# EAGLE board BLE -- HM-10 -- Carduino Breakout v1.0.3 (EAGLE 6.5.0)
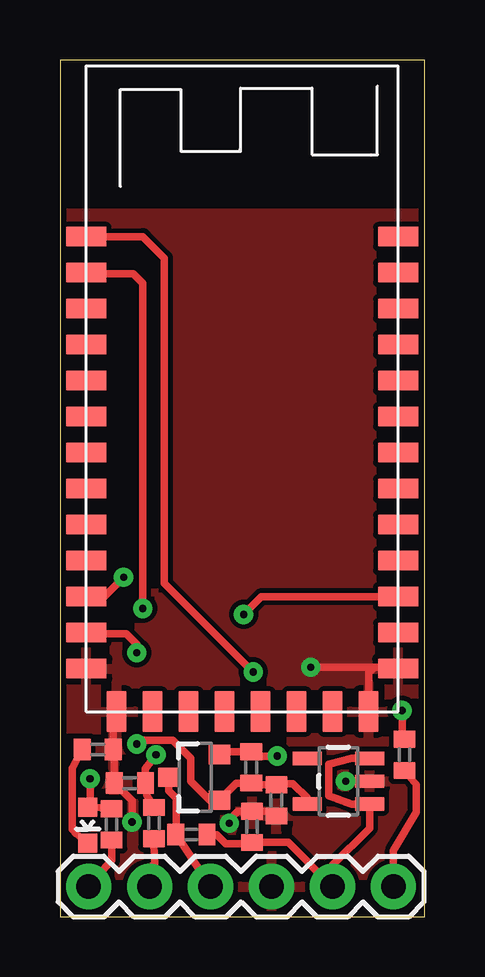
[diagram p0: board, top side]
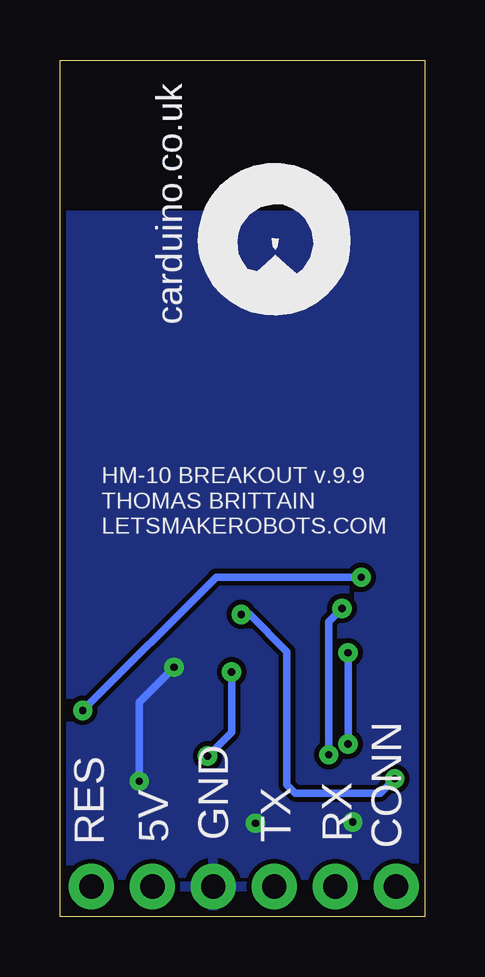
[diagram p1: board, bottom side, seen from below]

Size 15.2 x 35.7 mm. Coordinates in mm from the lower left corner, seen from the top.
Outline: 0,0 15.2,0 15.2,35.7 0,35.7 0,0
Copper layers (1*16): Top 0.035mm / dielectric 1.5mm / Bottom 0.035mm
Design rules "SparkFun (1)": minimum track width 8mil, minimum drill 20mil, track to track 8mil, track to pad 8mil, pad to pad 8mil, via to via 8mil, smd to smd 8mil, copper to edge 10mil, drill to drill 8mil, minimum pad ring 12mil, minimum via ring 10mil, stop-mask expansion 4mil, vias tented up to drill 25mil, thermal gap 10mil

## Footprints (pad centres in the part's own frame; a part is rotated, then mirrored left to right if it is on the bottom)
SOT23-3 = smd 0.8 x 0.9: 1 -0.95,-1; 2 0.95,-1; 3 0,1.1
C0402 = smd 0.7 x 0.9: 1 -0.65,0; 2 0.65,0
LED-0603 = smd 0.8 x 0.8: A 0,-0.75; C 0,0.75
1X06 = drill 1.016 pad 1.88: 1 0,0; 2 2.54,0; 3 5.08,0; 4 7.62,0; 5 10.16,0; 6 12.7,0
R0402 = smd 0.7 x 0.9: 1 -0.65,0; 2 0.65,0
SOT23-5 = smd 0.55 x 1.2: 1 -0.95,-1.3; 2 0,-1.3; 3 0.95,-1.3; 4 0.95,1.3; 5 -0.95,1.3
BLE-HM-10 = smd 1.676 x 0.813: 3.3V 0,3.29; AIO0 0,7.79; AIO1 0,6.29; GND1 0,1.79; GND4 13,1.79; PCM_CLK 0,13.79; PCM_IN 0,10.79; PCM_OUT 0,12.29; PCM_SYNC 0,9.29; PIO0 13,3.29; PIO1 13,4.79; PIO2 13,6.29; PIO3 13,7.79; PIO4 13,9.29; PIO5 13,10.79; PIO6 13,12.29; PIO7 13,13.79; PIO8 13,15.29; PIO9 13,16.79; PIO10 13,18.29; PIO11 13,19.79; RESET 0,4.79; UART_CTS 0,16.79; UART_RTS 0,15.29; UART_RX 0,18.29; UART_TX 0,19.79 | smd 0.813 x 1.676: GND2 1.27,0; GND3 11.77,0; SPI_CLK 8.77,0; SPI_CSB 4.27,0; SPI_MISO 7.27,0; SPI_MOSI 5.77,0; USB_D+ 10.27,0; USB_D- 2.77,0

## Placement (x,y rotation side)
BSS138  MOSFET-NCHANNELSMD  [SOT23-3]  5.64,5.81 90 top
C1  1uF  [C0402]  8,3.75 90 top
C2  1uF  [C0402]  9.02,4.85 270 top
CONN_LED  [LED-0603]  1.16,3.82 180 top
JP1  [1X06]  1.19,1.26 0 top
R3  10k  [R0402]  3.92,3.9 90 top
R4  20k  [R0402]  2.91,5.57 180 top
R5  10k  [R0402]  5.48,3.43 0 top
R6  10k  [R0402]  7.97,6.22 270 top
R7  470  [R0402]  1.57,6.97 180 top
R8  10K  [R0402]  2.15,3.85 90 top
R9  10K  [R0402]  14.35,6.75 270 top
U1  V_REG_LDOSMD  [SOT23-5]  11.6,5.65 90 top
U$1  BLE-HM-10  [BLE-HM-10]  1.09,8.55 0 top
U$3  [OSHW_FILLX70_NOTEXT]  61.67,22.38 0 top  (outside the outline)

## Library data of the parts
BSS138 CONN_LED U1 = SparkFun
C1 C2 R3-R9 = resistor
JP1 = SparkFun-Connectors
U$1 = Random parts
U$3 = ohw-logo

## Nets
3_3V: BSS138.1 C2.1 R6.2 U1.5 U$1.3.3V
5V: C1.1 JP1.5 R5.2 U1.1 U1.3
CONN: JP1.1 R8.1
GND: C1.2 C2.2 JP1.4 R4.2 R7.1 U1.2 U$1.GND1 U$1.GND2 U$1.GND3 U$1.GND4
HVTX->LVRX: R3.2 R4.1 U$1.UART_RX
LVRX->HVTX: BSS138.2 R6.1 U$1.UART_TX
N$2: CONN_LED.A R8.2 U$1.PIO1
N$26: CONN_LED.C R7.2
RES: R9.1 U$1.RESET
RES_C: JP1.6 R9.2
RX: JP1.2 R3.1
TX: BSS138.3 JP1.3 R5.1

## Tracks (layer width: path | path; a pad name or v marks a point on that pad's centre or on a via)
3_3V  (via drill 0.3)
  Top 0.305: U1.5 10.3,4.95 9.7,5.55 9.06,5.55 C2.1 8.04,5.5 R6.2 7.35,5.57 BSS138.1 6.24,4.86 5.45,5.65 5.45,6.6 4.7,7.35 3.5,7.35 3.35,7.2 v3.2,7.2 | v3.2,11 3.2,11.35 2.75,11.8 1.13,11.8 U$1.3.3V
  Bottom 0.305: v3.2,7.2 v3.2,11
5V
  Top 0.305: R5.2 6.52,3.43 6.9,3.05 7.95,3.05 C1.1 9.51,3.1 JP1.5 11.35,2.15 12.9,3.7 U1.1 | U1.1 | U1.1 12.15,4.7 11.2,5.05 11.2,6.35 12.15,6.6 U1.3
CONN
  Top 0.305: JP1.1 1.19,1.29 2.15,2.35 R8.1
GND  (via drill 0.3)
  Top 0.305: U$1.GND2 2.22,8.42 R7.1 2.26,6.58 R4.2 3,4.83 v3,3.95 | C2.2 8.82,4.4 C1.2 7.41,4.39 7.05,4.03 v7.05,3.9 | U1.2 v11.9,5.65 | v10.45,10.4 13.1,10.4 | 13.1,10.4 14.03,10.4 U$1.GND4 | U$1.GND3 12.86,10.16 13.1,10.4
  Bottom 0.305: v11.9,5.65 11.9,8.95 v10.45,10.4
  pour Bottom: 0.2,-0.83 15.2,-0.83 15,29.24 0.2,29.24
  pour Top: 0.25,29.3 0.05,-0.82 15.2,-0.82 15,29.3
HVTX->LVRX  (via drill 0.3)
  Top 0.305: R3.2 3.62,5.07 R4.1 3.56,6.16 v4,6.75 | v3.45,12.85 3.45,26.4 3.05,26.8 1.13,26.8 U$1.UART_RX
  Bottom 0.305: v4,6.75 4,12.3 v3.45,12.85
LVRX->HVTX  (via drill 0.3)
  Top 0.305: BSS138.2 6.75,6.87 R6.1 8.14,6.7 v9.05,6.7 | U$1.UART_TX 3.46,28.34 4.35,27.45 4.35,13.9 v8.05,10.2
  Bottom 0.305: v8.05,10.2 8.05,7.7 v9.05,6.7
N$2  (via drill 0.3)
  Top 0.305: R8.2 1.73,4.55 CONN_LED.A 1.25,4.66 v1.25,5.75 | U$1.PIO1 8.39,13.34 v7.65,12.6
  Bottom 0.305: v7.65,12.6 7.3,12.6 5.75,11.05 5.75,5.5 5.4,5.15 1.85,5.15 v1.25,5.75
N$26
  Top 0.305: CONN_LED.C 0.68,3.47 0.5,3.65 0.5,6.2 R7.2
RES  (via drill 0.3)
  Top 0.305: U$1.RESET 1.84,13.34 v2.65,14.15 | v14.25,8.6 14.25,7.5 R9.1
  Bottom 0.305: v2.65,14.15 8.7,14.15 v14.25,8.6
RES_C
  Top 0.305: JP1.6 13.89,2.74 14.85,4.35 14.85,5.5 R9.2
RX
  Top 0.305: JP1.2 3.73,2.07 3.95,2.2 3.9,3.02 R3.1
TX
  Top 0.305: JP1.3 4.88,3.36 R5.1 4.85,3.45 4.85,4.95 4.54,5.26 BSS138.3

## Text on the board
bNames: carduino.co.uk | HM-10 BREAKOUT v.9.9 / THOMAS BRITTAIN / LETSMAKEROBOTS.COM | CONN | RX | TX | GND | 5V | RES